# Altium PCB Mouse_Project.PcbDoc
Units mm, origin at the board's own origin, x right, y up, seen from the top; angles counter-clockwise.
Board outline 39.24 x 37.21 mm, 4 copper layers (Top Layer, Layer 1(GND), Layer 2(VCC), Bottom Layer), stack 0.603 mm thick; 26 components, 22 nets, 134 pads, 33 vias.
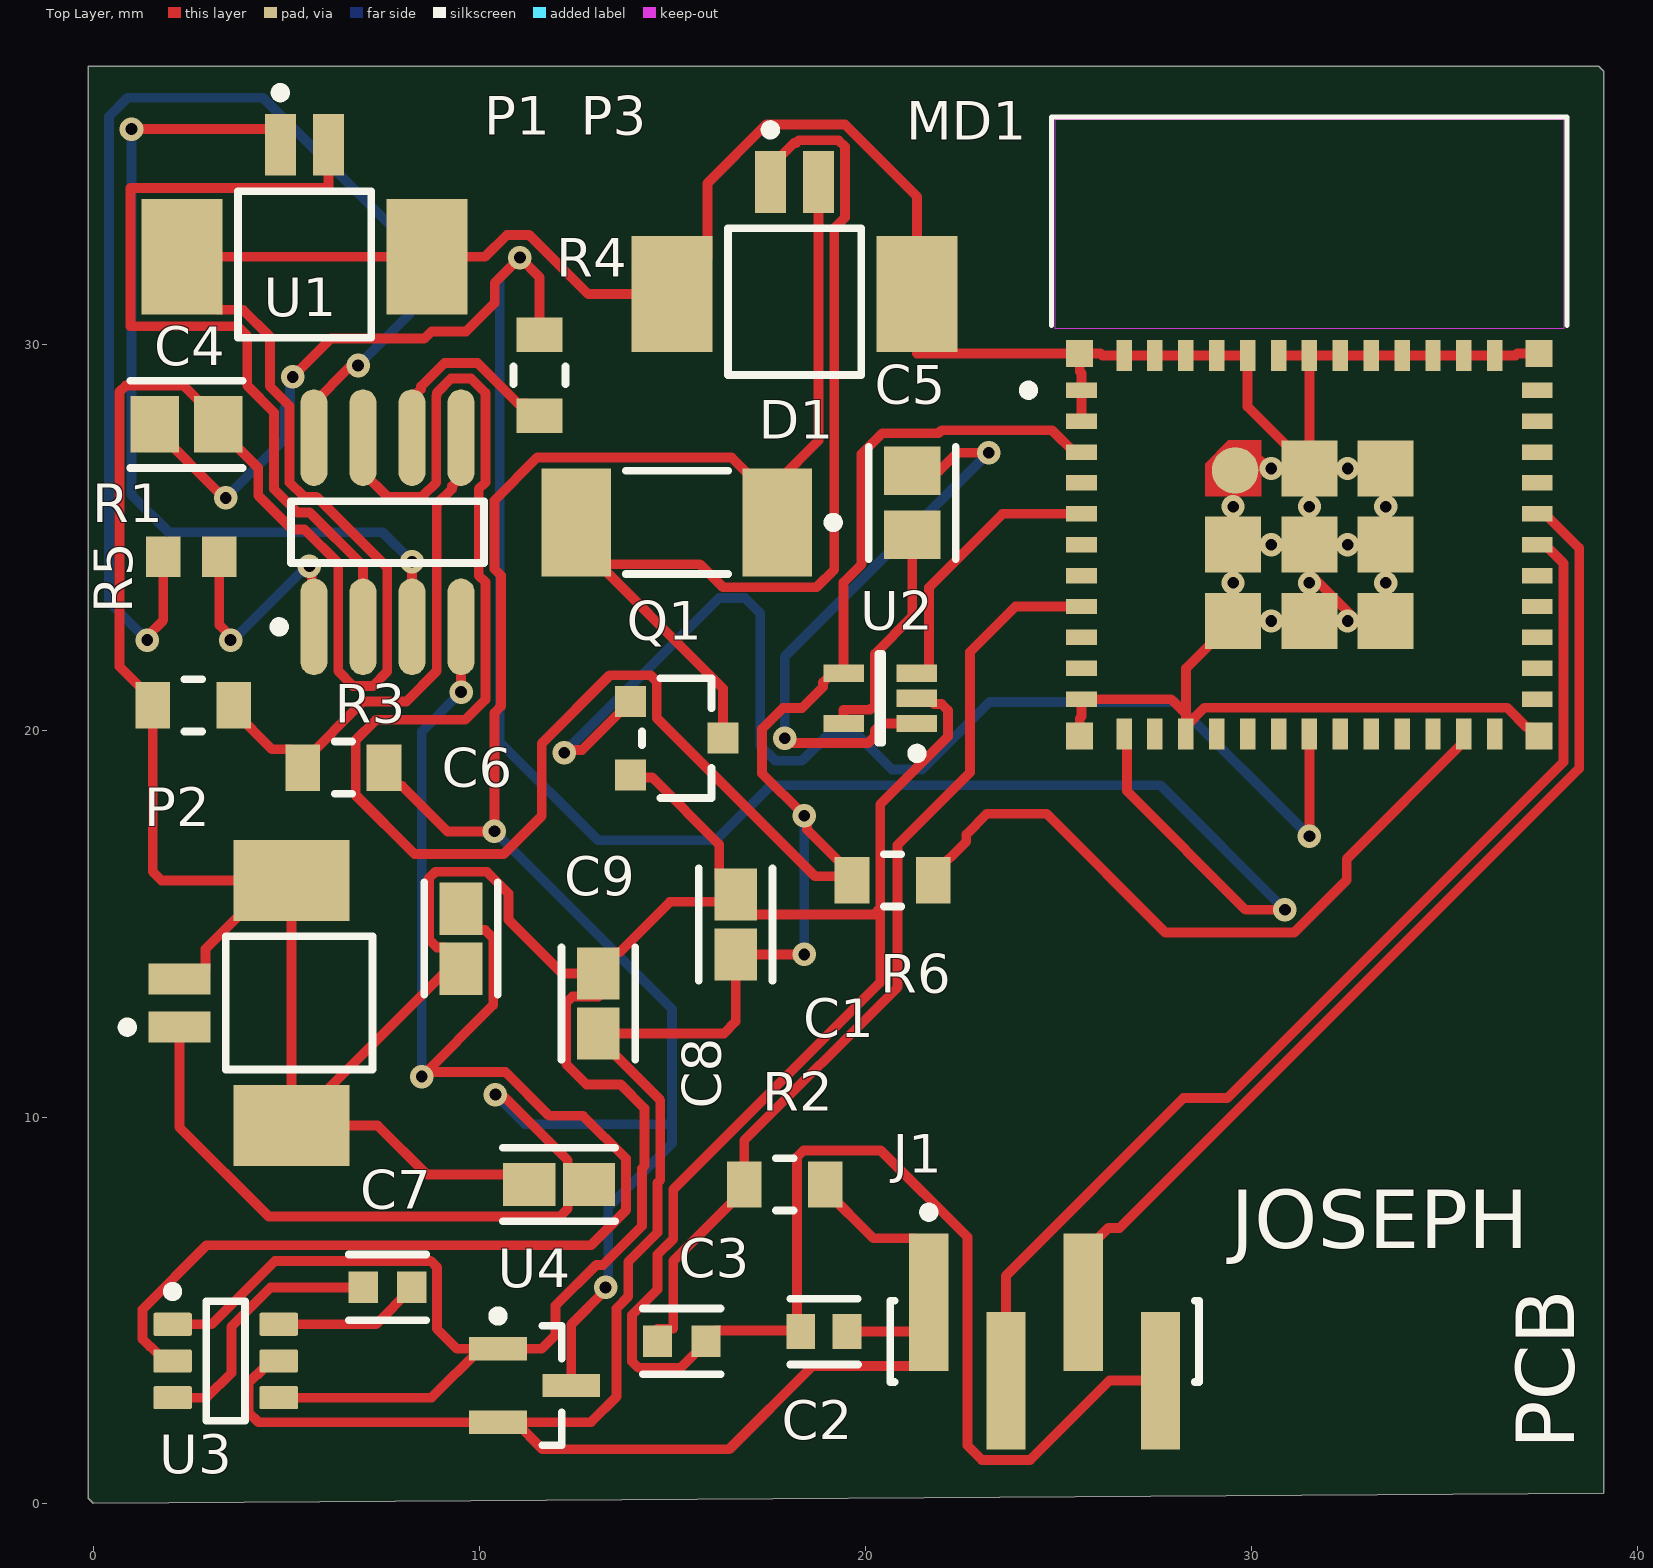
[diagram p0: Top Layer view]
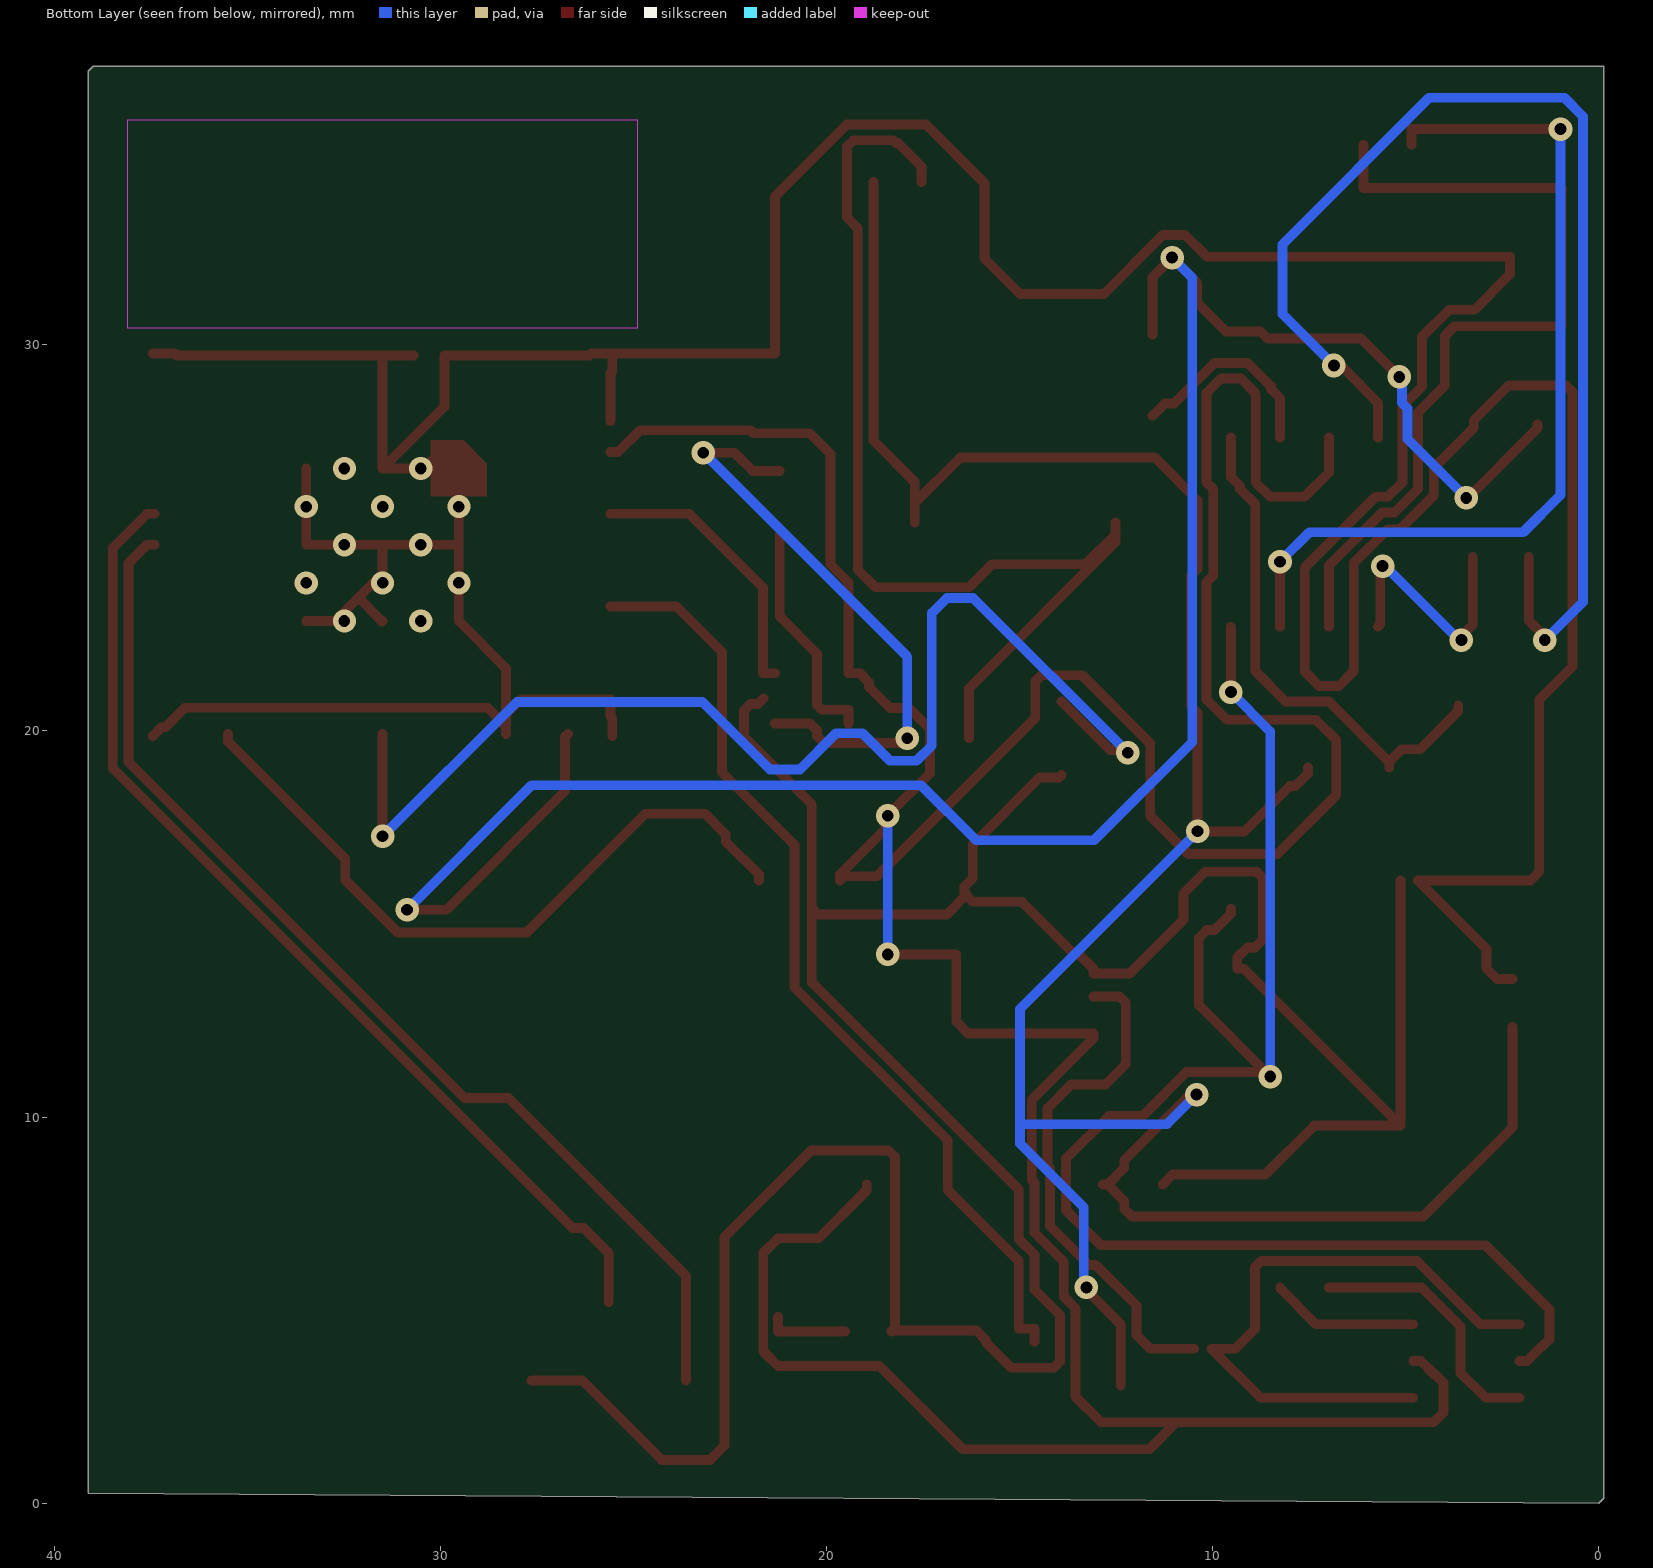
[diagram p1: Bottom Layer view, seen from below]
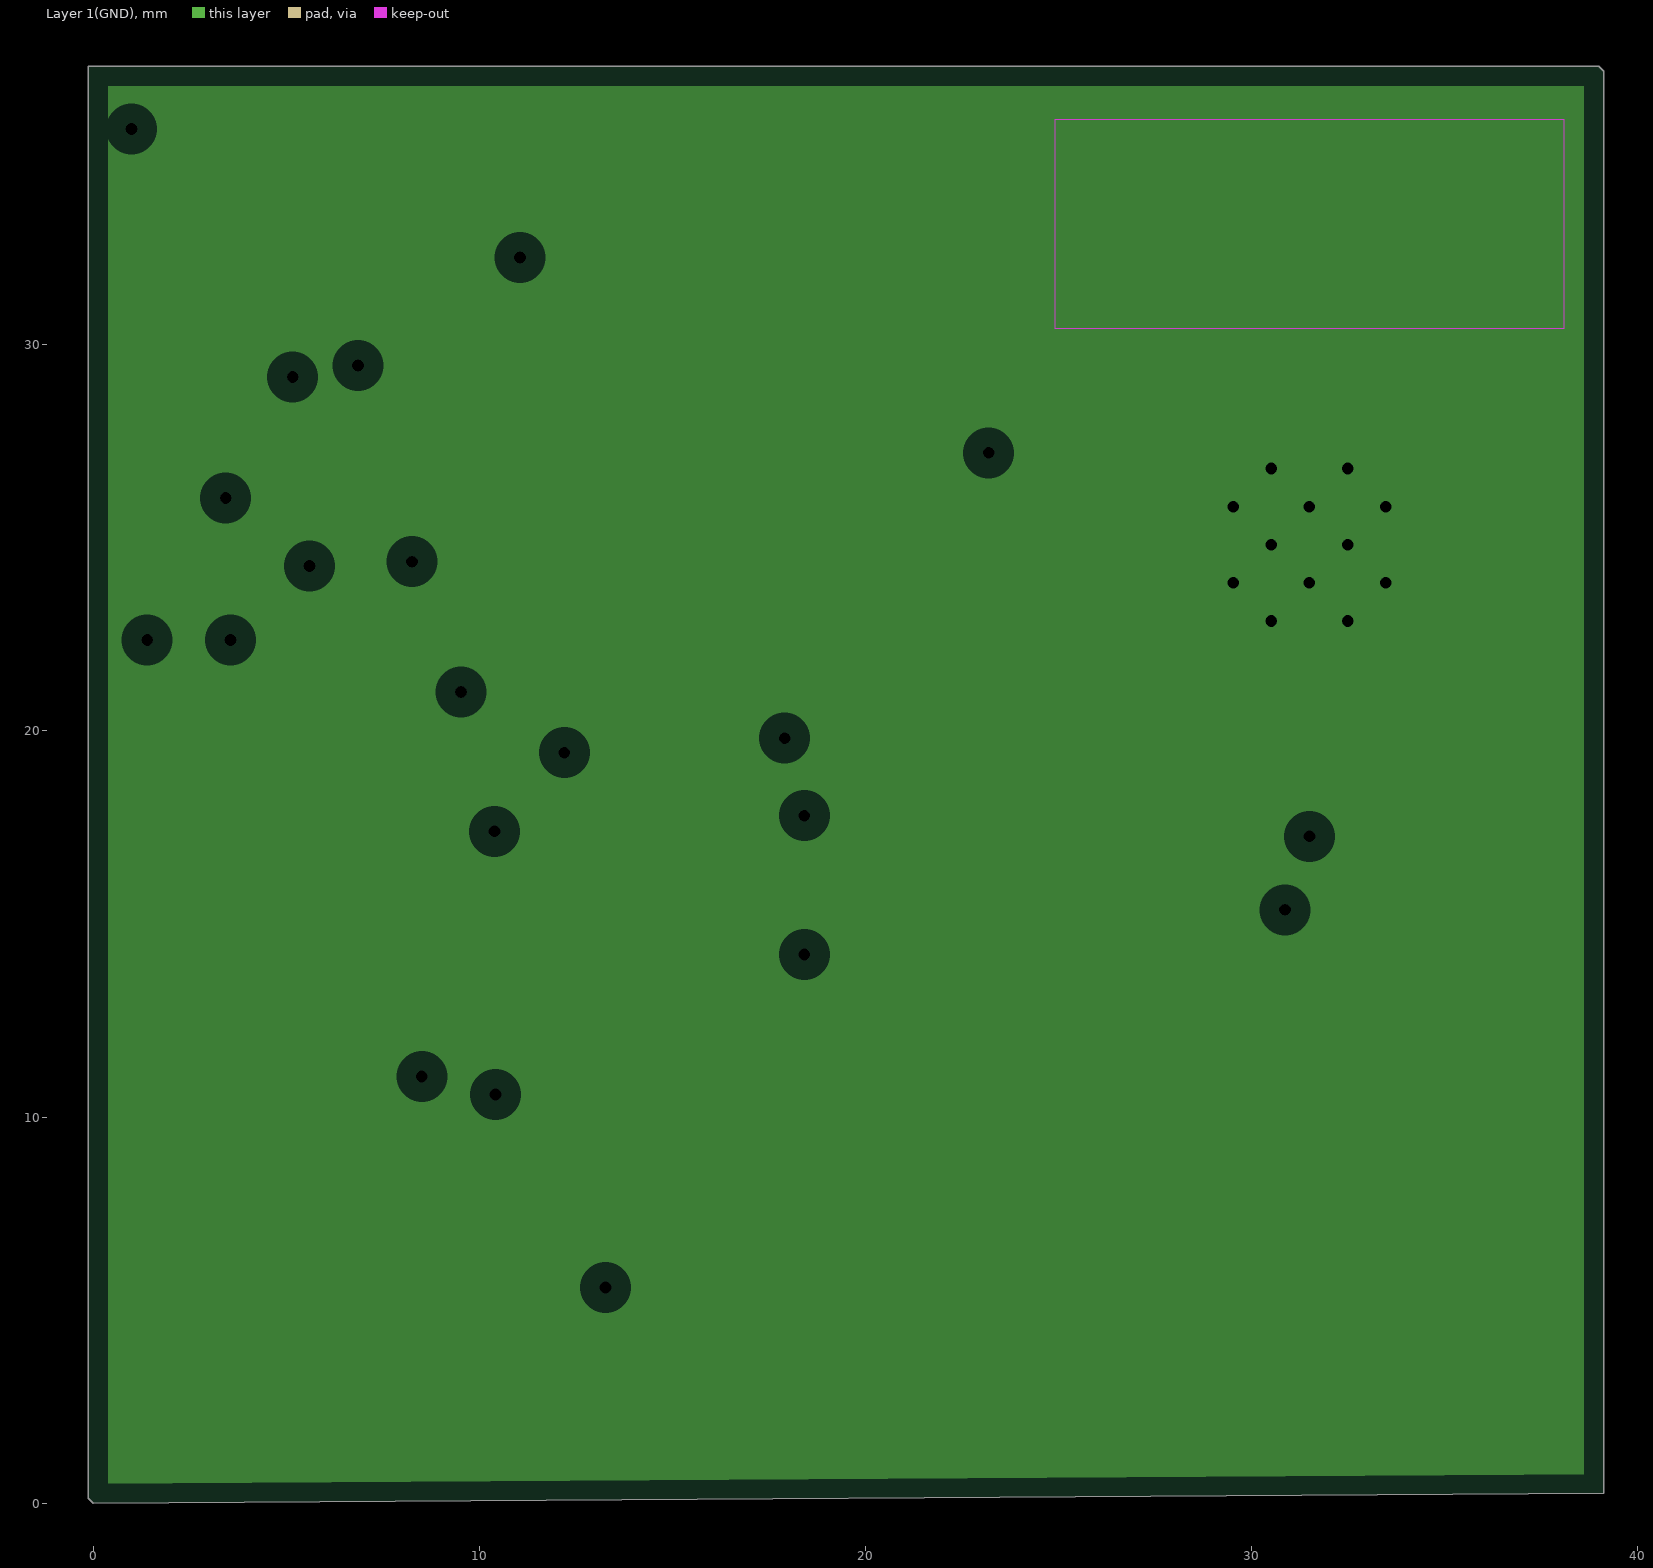
[diagram p2: Layer 1(GND), clearances drawn from the general rule]
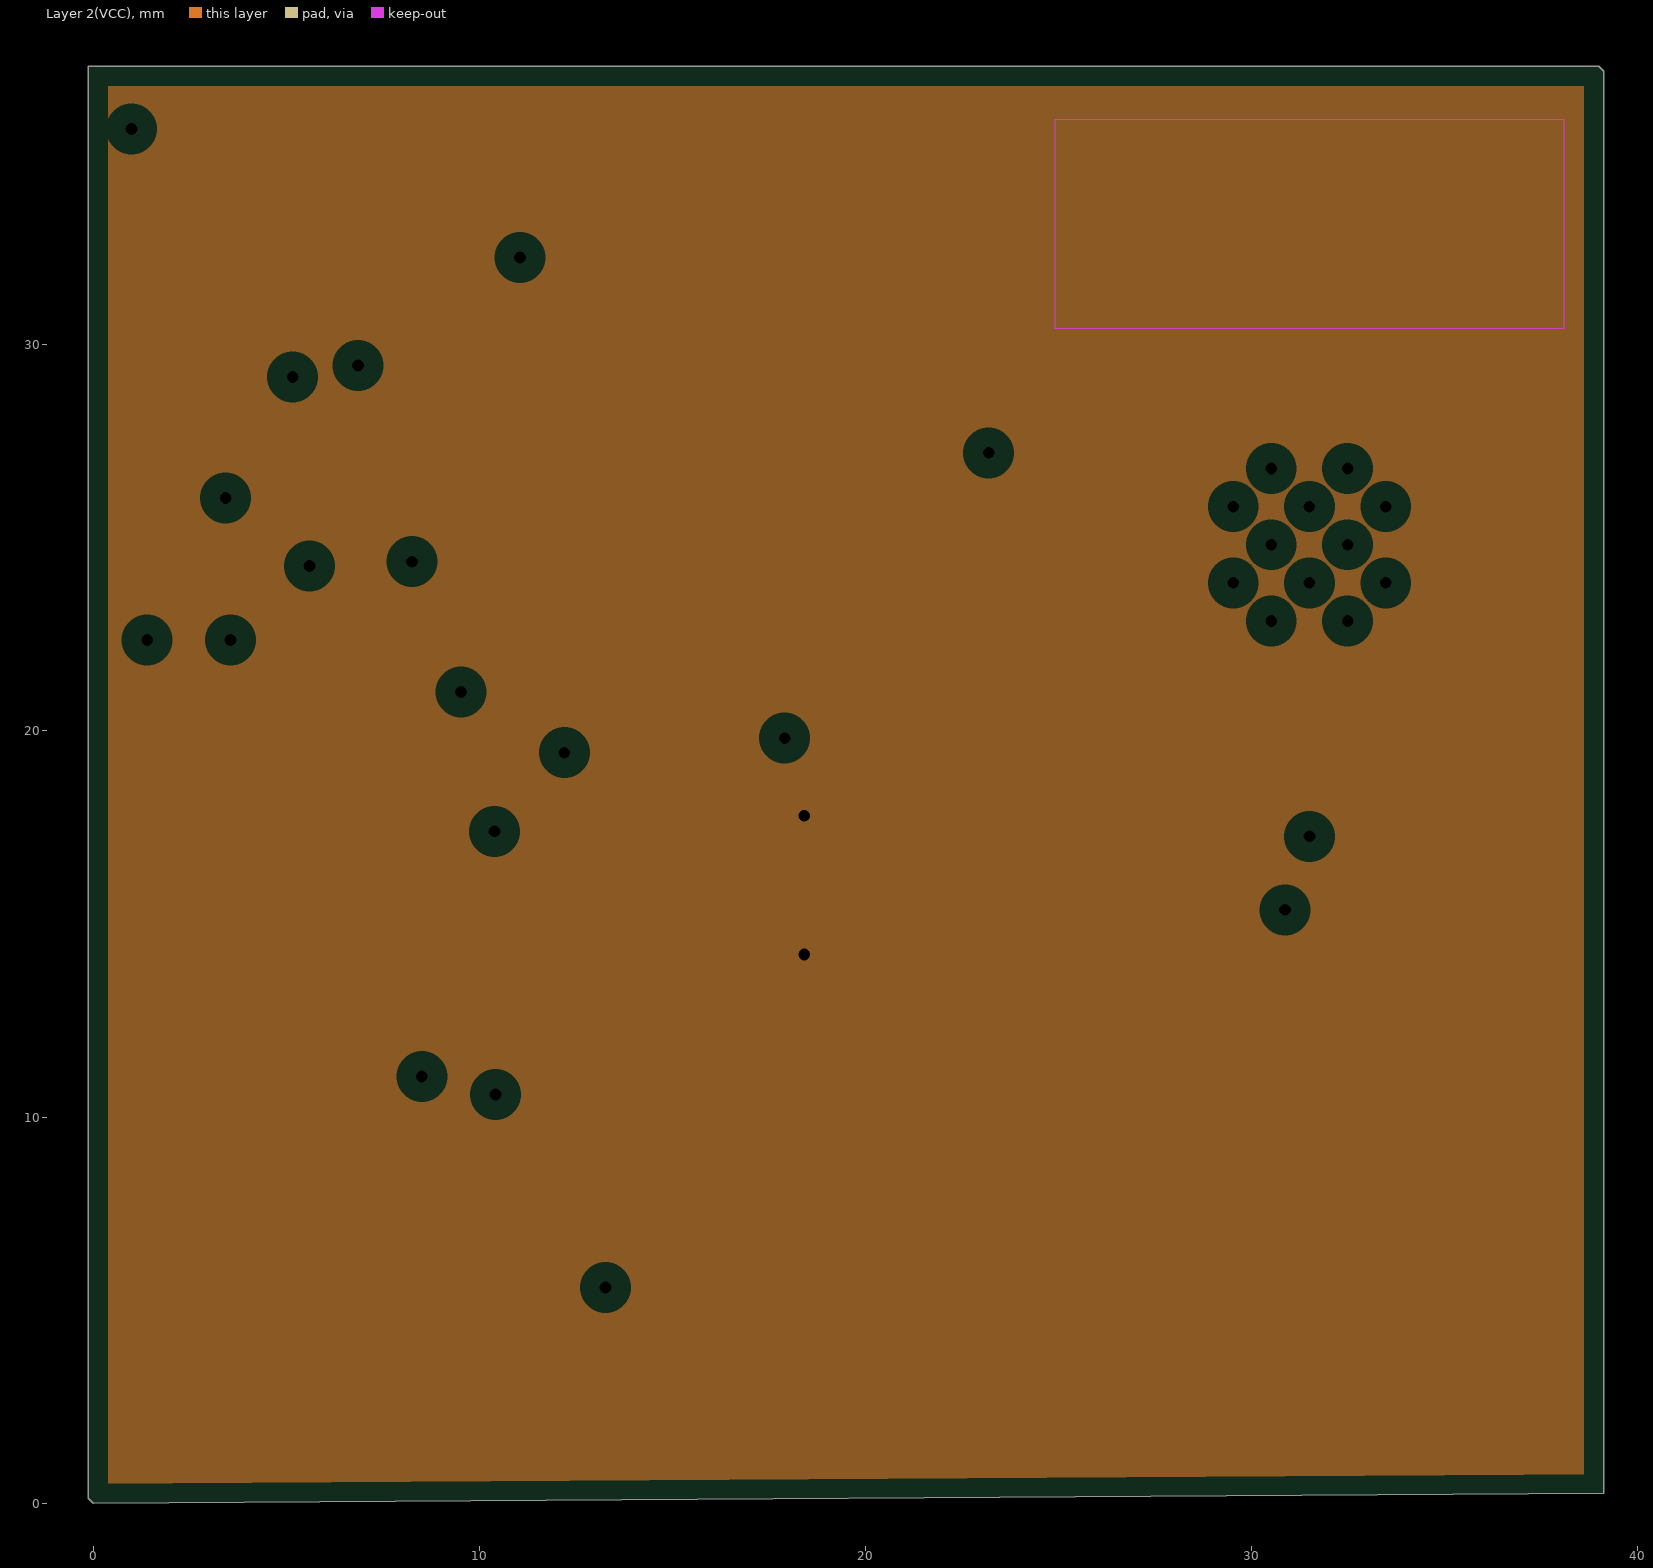
[diagram p3: Layer 2(VCC), clearances drawn from the general rule]
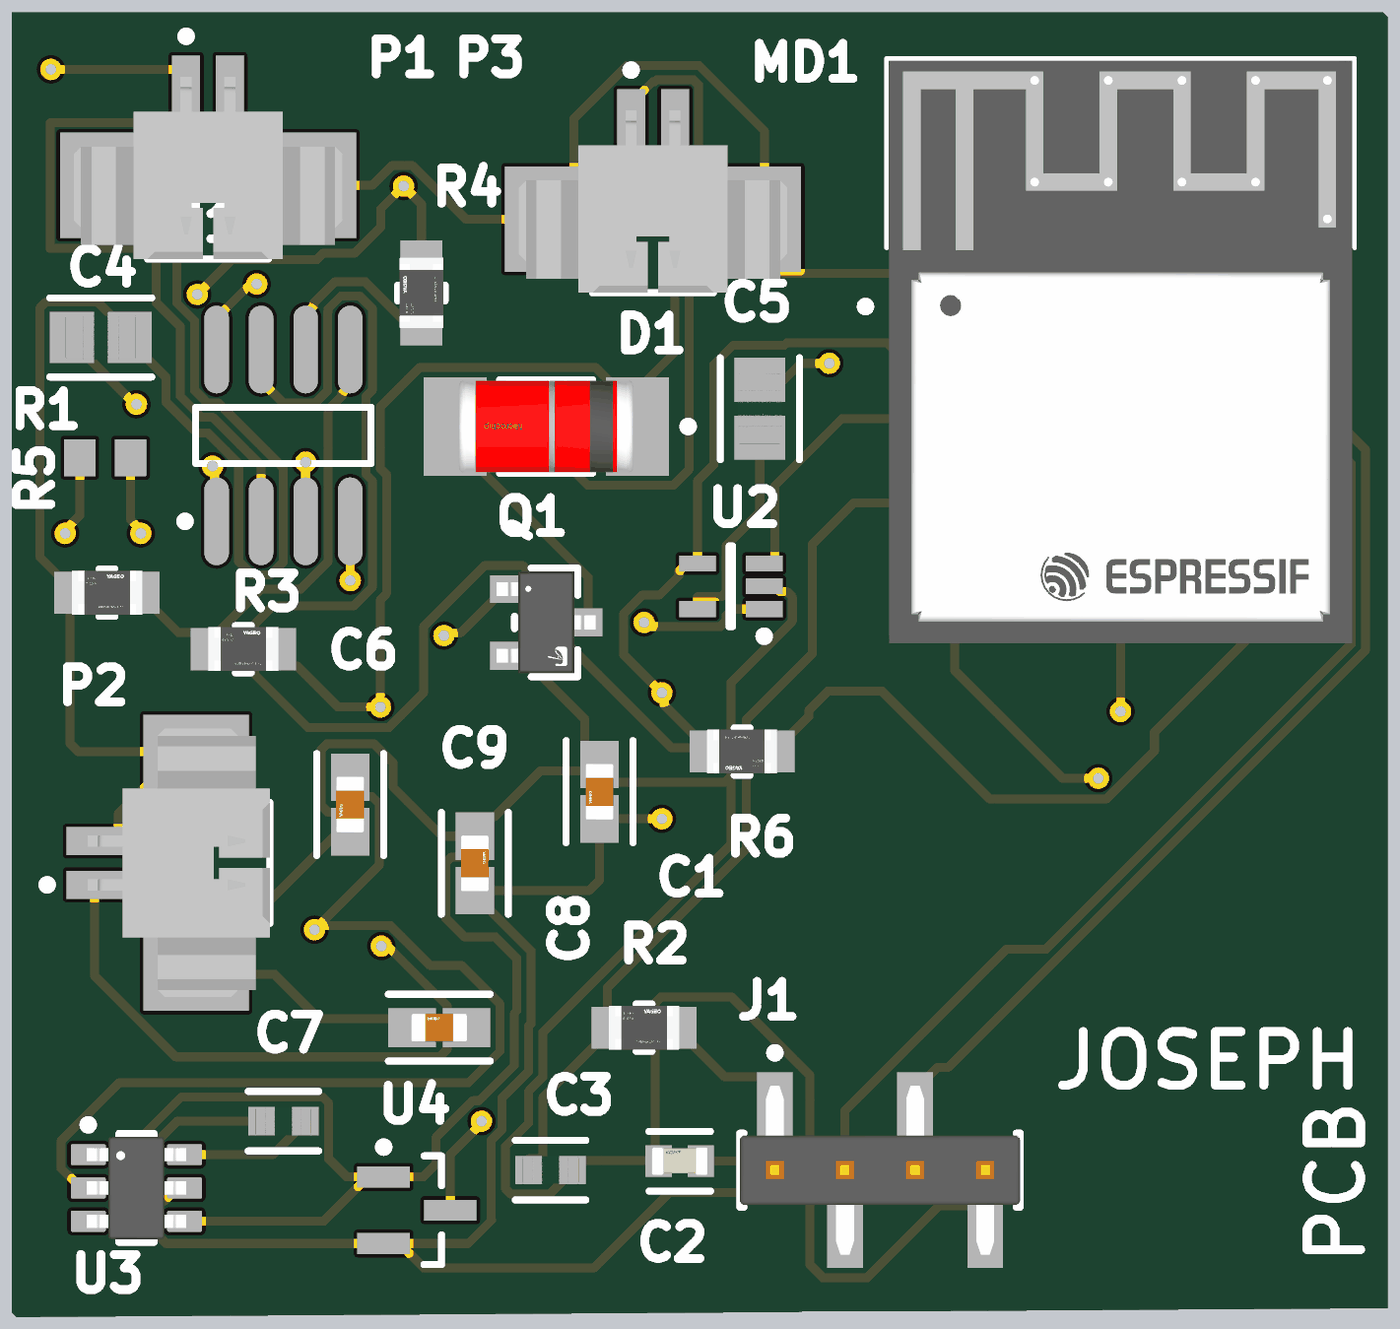
[diagram p4: 3D render of the assembled board from above, using the file's embedded part models]

## Layer stack, top to bottom
Top Solder: solder mask 0.0102, Solder Resist, Dk 3.5
Top Layer: signal copper 0.0356
Dielectric 2: prepreg 0.0711, PP-006, Dk 4.1
Layer 1(GND): plane copper 0.035, net GND
Dielectric 1: dielectric 0.32, FR-4, Dk 4.8
Layer 2(VCC): plane copper 0.035, net +3V3
Dielectric 3: prepreg 0.0711, PP-006, Dk 4.1
Bottom Layer: signal copper 0.0356
Bottom Solder: solder mask 0.0102, Solder Resist, Dk 3.5

## Board outline
0,0 -0.127,0.127 -0.127,37.211 38.989,37.211 39.116,37.084 39.116,0.254

## Design rules (kind name [scope] priority, off if disabled: settings)
Clearance [All] p1: gap=0.152 ignorepadtopadclearanceinfootprint=FALSE
MinimumSolderMaskSliver [All] p1: minsoldermaskwidth=0.01
PlaneClearance [All] p1: clearance=0.508
PlaneConnect [All] p1: planeconnectstyle=Relief reliefexpansion=0.508 reliefentries=4 reliefconductorwidth=0.254 reliefairgap=0.254
PolygonConnect [All] p1: connectstyle=Relief reliefconductorwidth=0.254 reliefentries=4 polygonreliefangle="90 Angle" airgapwidth=0.254
RoutingVias [All] p1: holewidth=0.305 width=0.61 viastyle="Through Hole" minholewidth=0.305 minwidth=0.61 maxholewidth=0.305 maxwidth=0.61
SMDNeckDown [All] p1: percent=70.000
SilkToSilkClearance [All] p1: silktosilkclearance=0.127
SilkToSolderMaskClearance [IsPad] p1: minsilkscreentomaskgap=0.025 clearancetoexposedcopper=TRUE
SolderMaskExpansion [All] p1: expansion=0.102 istentingtop=FALSE
SupplyNets "Schematic Supply Nets_2" [InNet('GND')] p1: voltage=0.000
SupplyNets "Schematic Supply Nets_1" [InNet('-3V3')] p2: voltage=0.000
SupplyNets "Schematic Supply Nets" [InNet('+3V3')] p3: voltage=0.000
Width [All] p1: maxlimit=0.254 minlimit=0.254 preferedwidth=0.254
Width EEG [InNet('EEG_SIGNAL')] p2: maxlimit=0.254 minlimit=0.152 preferedwidth=0.203 minimp=50.000000 maximp=50.000000 favimp=50.000000
Width VBAT [InNet('VBAT')] p3: maxlimit=0.889 minlimit=0.635 preferedwidth=0.635
25 further rules are at their usual default settings.

## Components (designator, comment, footprint, x,y, rotation, side; value= is the part's Value field where it differs from the comment)
C1 "10u" FP-CC0603-DC-IPC_A 16.637,14.986 r90 top
C2 "0.1uF" FP-C0603C-CF-MFG 18.923,4.445 r0 top value="0.10 μF"
C3 "1uF" FP-CL10-IPC_C 15.24,4.191 r0 top
C4 "100nF" FP-CL21-IPC_B 2.413,27.94 r0 top
C5 "100nF" FP-CL21-IPC_B 21.209,25.908 r90 top
C6 "10u" FP-CC0603-DC-IPC_A 9.525,14.619 r90 top
C7 "1uF" FP-CL10-IPC_C 7.62,5.588 r0 top
C8 "10u" FP-CC0603-DC-IPC_A 12.065,8.255 r0 top
C9 "10u" FP-CC0603-DC-IPC_A 13.081,12.94 r270 top
D1 "JANTX1N5819UR-1" FP-DO-213AB-MFG 15.113,25.4 r180 top
J1 "TMM-104-01-L-S-SM" FP-TMM-104-01-L-S-SM-MFG 24.638,4.191 r0 top
MD1 "ESP32-C3-MINI-1-N4" FP-ESP32-C3-MINI-1-N4-MFG 31.496,24.822 r0 top
P1 "Header" MOLX-53261-0271_V 5.471,33.729 r0 top
P2 "Header" MOLX-53261-0271_V 3.683,12.954 r90 top
P3 "Heater Conn" MOLX-53261-0271_V 18.161,32.766 r0 top
Q1 "AO3400A" FP-SOT23-MFG 15.113,19.812 r0 top
R1 "49.4" RESC1608X55X30ML15T15 2.54,24.511 r0 top
R2 "10k" FP-RT0805-MFG 17.907,8.255 r0 top value=10.2KΩ
R3 "10k" FP-RT0805-MFG 6.477,19.05 r0 top value=10.2KΩ
R4 "32k" FP-RT0805-MFG 11.557,29.21 r90 top value=332KΩ
R5 "10k" FP-RT0805-MFG 2.589,20.661 r0 top value=10.2KΩ
R6 "10k" FP-RT0805-MFG 20.701,16.129 r180 top value=10.2KΩ
U1 "LT1167" LT-S8-8_M 7.62,25.146 r90 top
U2 "MCP9700T-E/LT" SC70-LT5_M 20.381,20.843 r180 top
U3 "LM2664M6" DBV0006A_N 3.429,3.683 r0 top
U4 "MCP1700T-3302E/TT" SOT-23-TT3_N 11.43,3.048 r0 top

## Footprints (in the part's own frame and the unit in brackets; to place one, negate y for a bottom-side part, rotate by r counter-clockwise, add the part's x,y. Pads: shape width x height; smd on the part's side, far side on the other; paste and mask are expansions set on the pad)
DBV0006A_N [mm] "SOT23, 6-Leads, Body 3.05x1.75mm, Pitch 0.95mm, IPC Medium Density"
  rrect17% 1x0.6 smd: 1(-1.375,0.95) 2(-1.375,0) 3(-1.375,-0.95) 4(1.375,-0.95) 5(1.375,0) 6(1.375,0.95)
  silkscreen extent -1.5,-1.55 0.5,1.92, body extent -1.42,-1.46 1.42,1.46, height 1.11
FP-C0603C-CF-MFG [mm]
  rect 0.75x0.9 smd paste+0 mask+0: 1(-0.6,0) 2(0.6,0)
  silkscreen extent -0.87,-0.85 0.88,0.85, body extent -1.2,-0.6 1.2,0.6, height 0.25
FP-CC0603-DC-IPC_A [mm]
  rect 1.355x1.106 smd paste+0 mask+0: 1(-0.776,0) 2(0.776,0)
  silkscreen extent -1.45,-0.95 1.45,0.95, body extent -1.95,-1.05 1.95,1.05, height 0.25
FP-CL10-IPC_C [mm]
  rect 0.758x0.812 smd paste+0 mask+0: 1(-0.627,0) 2(0.627,0)
  silkscreen extent -1.01,-0.85 1.01,0.85, body extent -1.11,-0.55 1.11,0.55, height 0.25
FP-CL21-IPC_B [mm]
  rect 1.255x1.456 smd paste+0 mask+0: 1(-0.826,0) 2(0.826,0)
  silkscreen extent -1.45,-1.13 1.45,1.13, body extent -1.7,-0.98 1.7,0.98, height 0.25
FP-DO-213AB-MFG [mm]
  rect 1.8x2.8 smd paste+0 mask+0: 1(-2.6,0) 2(2.6,0)
  silkscreen extent -4.18,-1.34 1.33,1.34, body extent -2.5,-1.34 2.5,1.34, height 2.66
FP-ESP32-C3-MINI-1-N4-MFG [mm]
  rect 0.8x0.4 smd paste+0 mask+0: 1(-5.9,4) 2(-5.9,3.2) 3(-5.9,2.4) 4(-5.9,1.6) 5(-5.9,0.8) 6(-5.9,0) 7(-5.9,-0.8) 8(-5.9,-1.6) 9(-5.9,-2.4) 10(-5.9,-3.2) 11(-5.9,-4) 25(5.9,-4) 26(5.9,-3.2) 27(5.9,-2.4) 28(5.9,-1.6) 29(5.9,-0.8) 30(5.9,0) 31(5.9,0.8) 32(5.9,1.6) 33(5.9,2.4) 34(5.9,3.2) 35(5.9,4)
  rect 0.4x0.8 smd paste+0 mask+0: 12(-4.8,-4.9) 13(-4,-4.9) 14(-3.2,-4.9) 15(-2.4,-4.9) 16(-1.6,-4.9) 17(-0.8,-4.9) 18(0,-4.9) 19(0.8,-4.9) 20(1.6,-4.9) 21(2.4,-4.9) 22(3.2,-4.9) 23(4,-4.9) 24(4.8,-4.9) 36(4.8,4.9) 37(4,4.9) 38(3.2,4.9) 39(2.4,4.9) 40(1.6,4.9) 41(0.8,4.9) 42(0,4.9) 43(-0.8,4.9) 44(-1.6,4.9) 45(-2.4,4.9) 46(-3.2,4.9) 47(-4,4.9) 48(-4.8,4.9)
  rect 1.45x1.45 smd paste+0 mask+0: 49(-1.975,-1.975) 49(-1.975,0) 49(0,-1.975) 49(0,0) 49(0,1.975) 49(1.975,-1.975) 49(1.975,0) 49(1.975,1.975)
  round 1.207 smd paste+0 mask+0: 49(-1.926,1.926)
  rect 0.7x0.7 smd paste+0 mask+0: 50(5.95,4.95) 51(5.95,-4.95) 52(-5.95,-4.95) 53(-5.95,4.95)
  Top Layer region: -2.7,1.25 -2.7,2.1 -2.1,2.7 -1.25,2.7 -1.25,1.25
  Keep-Out Layer region: -6.6,5.6 6.6,5.6 6.6,11 -6.6,11
  silkscreen extent -7.4,3.88 6.68,11.08, body extent -6.78,-5.77 6.78,11.17, height 0.25
FP-RT0805-MFG [mm]
  rect 0.9x1.2 smd paste+0 mask+0: 1(-1.05,0) 2(1.05,0)
  silkscreen extent -0.22,-0.67 0.22,0.67, body extent -1.6,-0.77 1.6,0.77, height 0.25
FP-SOT23-MFG [mm]
  rect 0.8x0.8 smd paste+0 mask+0: 1(-1.2,0.95) 2(-1.2,-0.95) 3(1.2,0)
  silkscreen extent -0.9,-1.55 0.9,1.55, body extent -1.7,-1.78 1.7,1.78, height 0.25
FP-TMM-104-01-L-S-SM-MFG [mm]
  rect 1.02x3.56 smd paste+0 mask+0: 1(-3,1.015) 2(-1,-1.015) 3(1,1.015) 4(3,-1.015)
  silkscreen extent -4,-1.05 4,3.47, body extent -4.1,-2.9 4.1,2.89, height 0.25
LT-S8-8_M [mm] "SOIC, 8-Leads, Body 4.9x3.9mm, Pitch 1.27mm, IPC Low Density"
  oval 2.5x0.7 smd: 1(-2.45,1.905) 2(-2.45,0.635) 3(-2.45,-0.635) 4(-2.45,-1.905) 5(2.45,-1.905) 6(2.45,-0.635) 7(2.45,0.635) 8(2.45,1.905)
  silkscreen extent -2.57,-2.5 0.8,2.93, body extent -2,-2.5 2,2.5, height 1.76
MOLX-53261-0271_V [mm] "Header, 2-Leads, Pitch 1.25mm"
  rect 0.8x1.6 smd: 1(-0.625,1.45) 2(0.625,1.45)
  rect 2.1x3 smd: MP1(-3.175,-1.45) MP2(3.175,-1.45)
  silkscreen extent -1.73,-3.55 1.73,2.92, body extent -3.82,-3.55 3.83,1.65, height 3.41
RESC1608X55X30ML15T15 [mm] "Chip Resistor, 2-Leads, Body 1.60x0.80mm, IPC Low Density"
  rect 0.9x1.05 smd: 1(-0.725,0) 2(0.725,0)
  body extent -0.87,-0.48 0.87,0.48, height 0.55
SC70-LT5_M [mm] "SOT353, 5-Leads, Body 2x1.3mm, Pitch 0.65mm, Lead Span 2.1mm, IPC Low Density"
  rect 1.05x0.45 smd: 1(-0.95,0.65) 2(-0.95,0) 3(-0.95,-0.65) 4(0.95,-0.65) 5(0.95,0.65)
  silkscreen extent -1.07,-1.15 0.05,1.55, body extent -0.67,-1.12 0.68,1.13, height 1.1
SOT-23-TT3_N [mm] "SOT23, 3-Leads, Body 2.9x1.3mm, Pitch 0.95mm, Lead Span 2.4mm, IPC Medium Density"
  rect 1.5x0.6 smd: 1(-0.95,0.95) 2(-0.95,-0.95) 3(0.95,0)
  silkscreen extent -1.07,-1.55 0.7,1.92, body extent -0.7,-1.52 0.7,1.53, height 1.12

## Part data
C1 C6 C8 C9: library part CMP-03422-001507-1, "CAP CER 10UF 10V X5R 0603", Capacitance=10uF, Case Code (Imperial)=0603, Case Code (Metric)=1608, Dielectric=X5R, Max Operating Temperature=85°C, Min Operating Temperature=-55°C, Package Quantity=4000, Resistor Type=Ceramic, Tolerance=10%, Voltage Rating=10V, Case/Package=0603, Depth=0.8mm, Halogen Free="Halogen Free", Lead Free="Lead Free", Length=0.063inch, Mount="Surface Mount", Packaging="Tape and Reel", RoHS Compliant=Yes, Termination=SMD/SMT, Thickness=0.035inch, Voltage Rating (DC)=10V, Weight=7.1E-05oz, Width=0.031inch
C2: library part CMP-2006-03061-2, "CAP CER 0.1UF 50V X7R 0603", Capacitance="0.10 μF", Manufacturer=KEMET, Manufacturer Part Number=C0603C104K5RACTU, Package=C0603C-CF, Temperature="-55°C to +125°C", Temperature Characteristic=X7R, Temperature Coefficient=30ppm/°C, Temperature Range High=+125°C, Temperature Range Low=-55°C, Tolerance=0.1, Voltage Rating="50 V", Automotive=Yes, Automotive Grade="Grade 1", Category=Cap, ComponentLink2Description=Datasheet, ComponentLink2URL=https://api.kemet.com/component-edge/download/datasheet/C0603C100J5GACAUTO.pdf, Device Class L1="Passive Components", Device Class L2=Capacitors, Device Class L3="Ceramic Capacitors", Digikey Description="CAP CER 0.1UF 50V X7R 0603", Height=0.87mm, Lead Free=Yes, Material=Ceramic, Octopart=https://octopart.com/c0603c104k5ractu-kemet-139244, RoHS=TRUE
C3 C7: library part CMP-13271-004127-1, "Cap Ceramic 1uF 25V X5R ±10% Pad SMD 0603 +85°C T/R", Case Code (Imperial)=0603, Case Code (Metric)=1608, Dielectric=X5R, Max Operating Temperature=85°C, Min Operating Temperature=-55°C, Package Quantity=1, Tolerance=10%, Voltage=25V, Capacitance=1uF, Case/Package=0603, Contact Plating=Tin, Depth=0.8mm, Height=0.8mm, Lead Free="Lead Free", Length=1.6mm, Material=Ceramic, Mount="Surface Mount", Packaging="Tape and Reel", Radiation Hardening=No, Thickness=0.035inch, Voltage Rating=25V, Voltage Rating (DC)=25V, Width=0.031inch
C4 C5: library part CMP-13271-004863-1, "CL21 Series 0805 100nF 25V -20/+80% Tolerance Y5V Multilayer Ceramic Chip Capacitor"
D1: library part CMP-06358-000027-1, "DIODE SCHOTTKY 45V 1A DO213AB"
J1: library part CMP-02766-001552-1, "CONN HEADER SMD 4POS 2MM", Housing Color=Black, Max Current Rating=3.9A, Max Operating Temperature=125°C, Max Voltage Rating (AC)=500V, Min Operating Temperature=-55°C, Contact Material=Bronze, Contact Plating=Gold, Depth=1.97mm, Gender=Male, Housing Material=Polymer, Lead Free="Lead Free", Length=8mm, Number of Contacts=4, Number of Rows=1, Orientation=Straight, Packaging=Bulk, Pitch=2mm, Radiation Hardening=No, REACH SVHC="No SVHC", RoHS Compliant=Yes, Termination=Solder
MD1: library part CMP-10700-116589975-1, "Multiprotocol Modules SMD module, ESP32-C3FN4, PCB antenna, -40 C +85 C", Ambient Temperature Range High=85°C, Current - Receiving=84mA, Current - Transmitting=350mA, Max Frequency=2.484GHz, Max Supply Voltage=3.6V, Min Operating Temperature=-40°C, Min Supply Voltage=3V, Data Rate=150Mbps, Height=2.55mm, Interface=SPI, Max Operating Temperature=85°C, Number of GPIO=13
P1 P2 P3: library part CMP-2000-05633-1, "PicoBlade(TM) Header, Right Angle, -40 to 85 degC, 2-Pin SMD, RoHS, Tape and Reel", Current - Max=1A, Manufacturer=Molex, Package Description="2-Leads Header, Pitch 1.25 mm, Mated Height 3.4 mm", Package Reference=53261-0271, Package Version="Rev. H, 11/2014", Voltage - Max=125V, Brand=Molex, Contact Material=PhosphorBronze, Contact Plating=Tin, Current Rating=1A, Datasheet URL=http://www.molex.com/webdocs/datasheets/pdf/en-us/0532610271_PCB_HEADERS.pdf, Datasheet Version=03/2016, Factory Pack Quantity=1000, Housing Material=Thermoplastic, Manufacturer URL=http://www.molex.com/, Mounting Angle=Right, Mounting Style=SMD/SMT, Mounting Technology=SurfaceMount, Number of Positions=2, Number of Positions / Contacts=2, Number of Rows=1, Package URL=http://www.molex.com/pdm_docs/sd/532610271_sd.pdf, Packaging=Reel, Pitch=1.25mm, Product Category=1.25mmConnectors, Product Type=Headers, RoHS=Details, Series=53261, Termination Style=SMD, Tradename=PicoBlade, Type=Shrouded, Voltage Rating=125V
Q1: library part CMP-83955-000006-1, "MOSFET N-CH 30V 5.7A SOT23", Case/Package=SOT-23, Continuous Drain Current (ID)=5.7A, Drain to Source Voltage (Vdss)=30V, Gate to Source Voltage (Vgs)=12V, Input Capacitance=630pF, Max Operating Temperature=150°C, Max Power Dissipation=1.4W, Min Operating Temperature=-55°C, Lead Free="Lead Free", Mount="Surface Mount", Number of Elements=1, Number of Pins=3, Packaging="Tape and Reel", Power Dissipation=1.4W, Radiation Hardening=No, Rds On Max=26.5mR
R1: library part CMP-2000-00538-1, Manufacturer=Panasonic, Part Number=ERJ-3EKF49R9V
R2 R3 R5 R6: library part CMP-03412-025153-1, "RES SMD 10.2K OHM 0.5% 1/8W 0805", Manufacturer=Yageo, Manufacturer Part Number=RT0805DRD0710K2L, Package=RT0805, Power Rating=0.125W, Resistance=10.2KΩ, Temperature="-55°C to +155°C", Temperature Coefficient="25 ppm/°C", Temperature Range High=+155°C, Temperature Range Low=-55°C, Tolerance=0.01, Voltage Rating=150V, Automotive=No, Category=Res, ComponentLink2Description=Datasheet, ComponentLink2URL=http://www.yageo.com/documents/recent/PYu-RT_1-to-0.01_RoHS_L_9.pdf, Composition="Thin Film", Device Class L1="Passive Components", Device Class L2=Resistors, Device Class L3="Chip SMD Resistors", Digikey Description="RES SMD 10.2K OHM 0.5% 1/8W 0805", Footprint Url=http://www.yageo.com/exep/pages/download/literatures/PYu-R_Mount_10.pdf, Height=0.6mm, Ipc Land Pattern Name=RESC200125X50, Lead Free=Yes, Octopart=https://octopart.com/rt0805drd0710k2l-yageo-1441674, RoHS=TRUE, Series=RT
R4: library part CMP-03412-016239-1, "RES SMD 332K OHM 0.1% 1/8W 0805", Manufacturer=Yageo, Manufacturer Part Number=RT0805BRE07332KL, Package=RT0805, Power Rating=0.125W, Resistance=332KΩ, Temperature="-55°C to +155°C", Temperature Coefficient="50 ppm/°C", Temperature Range High=+155°C, Temperature Range Low=-55°C, Tolerance=0.0025, Voltage Rating=150V, Automotive=No, Category=Res, ComponentLink2Description=Datasheet, ComponentLink2URL=http://www.yageo.com/documents/recent/PYu-RT_1-to-0.01_RoHS_L_9.pdf, Composition="Thin Film", Device Class L1="Passive Components", Device Class L2=Resistors, Device Class L3="Chip SMD Resistors", Digikey Description="RES SMD 332K OHM 0.1% 1/8W 0805", Footprint Url=http://www.yageo.com/exep/pages/download/literatures/PYu-R_Mount_10.pdf, Height=0.6mm, Ipc Land Pattern Name=RESC200125X50, Lead Free=Yes, Octopart=https://octopart.com/rt0805bre07332kl-yageo-1228961, RoHS=TRUE, Series=RT
U1: library part CMP-0359-03162-2, "Single Channel, Precision Operational Amplifier, Low Bias Current IA, 1 MHz Typical GBW, 1.2 V/us Typical SR, 4.6 to 40 V, 8-Pin SOIC (S8-8), Industrial, Pb-Free", Manufacturer="Linear Technology", PartNumber=LT1167AIS8#PBF, Channels (#)=1, ComponentLink1Description="Manufacturer URL", ComponentLink1URL=http://www.linear.com/, ComponentLink2Description=Datasheet, ComponentLink2URL=http://cds.linear.com/docs/en/datasheet/1167fc.pdf, ComponentLink3Description="Package Specification", ComponentLink3URL=http://cds.linear.com/docs/en/packaging/05081610_G_SO8.pdf, DatasheetVersion="Rev. C", GBW (MHz) Typical=1, Is (mA) Typical=0.9, Linear Technology Part Number=LT1167, Mounting Technology="Surface Mount", PackageDescription="8-Pin Plastic Small Outline, Body 4.9 x 3.9 mm, Pitch 1.27 mm", PackageReference=LT-S8-8, PackageVersion="Rev G", RevisionNote="URLs updated", RoHS=Pb-Free, SR (V/us) Typical=1.2, Type=IA, Vos (mV) Typical=0.015, Vs Max (V)=40, Vs Min (V)=4.6
U2: library part CMP-0192-00174-1, "Low-Power Linear Active Thermistor IC, 5-Pin SC-70, Extended Temperature, Tape and Reel", Code_IPC=SOT353-5, DatasheetVersion="revE, Apr-2009", PackageDescription="5-Lead Plastic Small Outline Transistor (LT) [SC70]", PackageReference=SC70-LT5, PackageVersion="revBB, Aug-2009"
U3: library part CMP-0065-00095-3, "Switched Capacitor Voltage Converter, 6-pin SOT-23", Manufacturer="Texas Instruments", PackageTopMarking=S03A*XTT, PowerWise=N, Code_IPC=SOT26A-6, Code_JEDEC=MO-178-AB, ComponentLink1Description="Datasheet URL", ComponentLink1URL=http://www.ti.com/general/docs/lit/getliterature.tsp?genericPartNumber=LM2664&fileType=pdf, CompType="Switch Caps", PackageDescription="Molded SOT-23, .115 x .063 x .040in Body, 6 Lead, .0375in in Pitch", PackageReference=DBV0006A, PinCount=6, RoHS=N
U4: library part CMP-0136-00791-1, "Low Quiescent Current LDO, 3-Pin SOT-23, Extended Temperature, Tape and Reel", Code_IPC=SOT23-3, DatasheetVersion="revB, Feb-2007", PackageDescription="3-Lead Plastic Small Outline Transistor (TT) [SOT-23]", PackageReference=SOT-23-TT3, PackageVersion="revBB, Aug-2009"

## Via types
v1: diameter 0.61, hole 0.305, Top Layer to Bottom Layer, 21 vias
v2: diameter 0.6, hole 0.3, Top Layer to Bottom Layer, 12 vias

## Nets (pads, with @x,y where several pads share a name; then routed paths per layer and width w, separated by ;. In a path a pad name is that pad's centre, name@x,y a point inside that pad or via, vN(x,y) a via of type N, cw(c..) or ccw(c..) an arc to the next point about the centre after c; other vN are vias at no path point)
+3V3: C1.1 C2.2 C9.2 J1.1 MD1.3 R2.2 R6.2 U1.7 U2.4 U3.5 U4.2 | length 113.1
  Top Layer w0.254: U3.5 4.604,3.683 4.233,3.312 4.218,3.312 4.025,3.119 4.025,2.347 4.274,2.098 U4.2 ; U1.7 6.985,26.696 7.614,26.067 8.516,26.067 8.884,26.435 8.884,28.671 8.896,28.683 8.896,28.757 9.264,29.125 9.786,29.125 10.154,28.757 10.154,26.435 9.982,26.263 9.982,24.029 10.154,23.857 10.154,20.809 9.633,20.287 7.319,20.287 6.798,19.766 6.798,18.334 8.317,16.815 10.631,16.815 11.614,17.799 11.614,19.68 13.376,21.441 14.429,21.441 14.592,21.278 14.592,20.337 18.693,16.237 19.543,16.237 R6.2 19.651,16.279 18.483,17.447 18.483,17.737 v1(18.415,17.805) 17.323,18.898 17.323,20.054 17.866,20.597 18.353,20.597 18.896,21.141 18.896,21.258 19.131,21.493 U2.4 19.431,23.848 19.898,24.315 19.898,27.173 20.436,27.711 21.896,27.711 21.972,27.788 24.83,27.788 25.396,27.222 MD1.3 ; 13.548,2.771 13.548,5.04 13.854,5.346 13.854,6.251 14.615,7.012 14.615,8.297 14.686,8.368 14.686,10.435 13.081,12.04 C9.2 16.332,12.165 16.637,12.47 C1.1 v1(18.415,14.21) ; 13.557,2.762 12.893,2.098 U4.2 ; R2.2 18.957,8.105 20.203,6.859 21.255,6.859 21.638,6.476 J1.1 21.638,3.936 21.255,3.553 18.627,3.553 16.471,1.397 11.631,1.397 10.93,2.098 U4.2 ; C2.2 21.255,4.445 21.258,4.448 J1.1@21.258,4.825
  Bottom Layer w0.254: v1(18.415,14.21) v1(18.415,17.805)
-3V3: C6.2 U1.4 U3.2 | length 40.6
  Top Layer w0.254: U3.2 1.854,3.683 1.483,4.054 1.468,4.054 1.275,4.247 1.275,5.019 2.936,6.68 12.891,6.68 13.798,7.586 13.798,8.924 12.689,10.033 11.808,10.033 10.675,11.166 8.723,11.166 8.605,11.049 v1(8.509,11.049) 10.358,12.898 10.358,14.636 10.15,14.844 9.951,14.844 9.525,15.27 C6.2 ; v1(9.525,21.006) U1.4
  Bottom Layer w0.254: v1(8.509,11.049) 8.509,19.99 v1(9.525,21.006)
EEG_SIGNAL: C4.1 MD1.12 R4.2 | length 59.2
  Top Layer w0.254: C4.1 1.587,27.839 3.391,26.035 v1(3.429,26.035) ; v1(5.164,29.167) 6.156,30.159 8.574,30.159 8.759,30.345 9.657,30.345 10.396,31.084 10.396,31.605 v1(11.049,32.258) 11.557,31.75 R4.2 ; MD1.12 26.769,19.849 26.769,18.443 29.845,15.367 v1(30.861,15.367)
  Bottom Layer w0.254: v1(3.429,26.035) 4.953,27.559 4.953,28.354 5.096,28.496 5.096,29.099 v1(5.164,29.167) ; v1(11.049,32.258) 10.525,31.734 10.525,19.71 13.065,17.17 16.129,17.17 17.551,18.593 27.635,18.593 v1(30.861,15.367)
GND: C1.2 C2.1 C3.2 C4.2 C6.1 C8.1 C9.1 J1.4 MD1.1 MD1.2 MD1.11 MD1.14 MD1.36 MD1.37 MD1.38 MD1.39 MD1.40 MD1.41 MD1.42 MD1.43 MD1.44 MD1.45 MD1.46 MD1.47 MD1.48 MD1.49 MD1.50 MD1.51 MD1.52 MD1.53 P1.MP1 P1.MP2 P2.2 P2.MP1 P2.MP2 P3.MP1 P3.MP2 Q1.2 R5.1 U2.2 U3.1 U3.4 U4.1 | length 247.9
  Top Layer w0.254: U3.1 3.064,4.633 4.704,6.273 8.742,6.273 8.905,6.11 8.905,4.516 9.423,3.998 10.03,3.998 8.765,2.733 U3.4 ; P2.2 2.633,13.579 2.906,13.852 2.906,14.352 4.683,16.129 1.768,16.129 1.539,16.358 R5.1 1.539,20.811 0.68,21.669 0.68,28.784 0.844,28.948 2.332,28.948 3.239,28.041 C4.2 3.239,27.839 4.273,26.805 4.273,26.099 5.154,25.218 5.475,25.218 6.344,24.348 6.344,21.547 6.724,21.167 7.246,21.167 7.614,21.535 7.614,24.228 5.776,26.067 5.454,26.067 5.086,26.435 5.086,28.418 4.579,28.925 4.579,30.209 3.883,30.906 3.219,30.906 2.296,31.829 P1.MP1 P1.MP2 10.148,32.279 10.712,32.842 11.291,32.842 12.817,31.316 P3.MP1 15.909,32.239 15.909,34.184 17.427,35.702 19.47,35.702 21.336,33.836 P3.MP2 21.336,29.772 MD1.53 ; P2.MP2 P2.MP1 ; U4.1 11.611,3.998 11.974,4.361 11.974,5.118 13.028,6.172 13.2,6.172 14.209,7.181 14.209,8.668 14.28,8.739 14.28,10.226 13.661,10.846 12.774,10.846 12.248,11.372 12.248,12.958 12.412,13.122 C9.1@13.081,13.122 ; C8.1 11.035,8.509 8.636,8.509 7.366,9.779 P2.MP1 ; C9.1 12.147,13.716 10.753,15.11 10.753,15.792 10.194,16.351 8.856,16.351 8.692,16.187 8.692,14.601 8.9,14.393 9.099,14.393 9.361,14.131 9.361,13.843 9.197,13.843 P2.MP1 ; C9.1@13.081,13.84 13.507,14.266 13.631,14.266 14.939,15.574 16.211,15.574 16.424,15.787 16.424,15.975 16.211,16.188 16.211,17.063 14.478,18.796 13.979,18.796 Q1.2 ; C1.2@16.369,15.762 16.881,15.25 20.217,15.25 20.38,15.413 ; U2.2@21.631,20.843 21.777,20.697 21.972,20.697 22.135,20.534 22.135,19.852 20.38,18.097 20.38,15.413 ; MD1.52 25.546,20.32 25.596,20.37 MD1.11 27.915,20.822 28.296,20.441 ; MD1.2 MD1.1 25.596,29.261 25.546,29.311 MD1.53 ; J1.4 26.323,3.176 24.264,1.117 23.012,1.117 22.638,1.491 22.638,6.891 20.395,9.134 18.391,9.134 18.228,8.971 18.228,4.54 C2.1 18.298,4.47 16.119,4.47 15.867,4.218 C3.2 15.867,4.164 15.209,3.506 14.118,3.506 13.955,3.669 13.955,4.872 14.615,5.533 14.615,6.438 15.021,6.844 15.021,8.129 20.38,13.488 20.38,15.413 ; MD1.14 MD1.14@28.296,20.122 ; MD1.43 MD1.42 ; MD1.49@31.496,22.847 31.508,22.835 MD1.49@32.124,23.451 ; MD1.49@33.471,22.847 32.728,22.847 MD1.49@32.124,23.451 ; MD1.49@33.471,26.797 v2(33.471,25.809) 33.471,24.822 v2(32.484,24.822) MD1.49@31.496,24.822 ; MD1.51 37.223,20.095 37.118,20.095 36.612,20.601 28.775,20.601 MD1.14@28.296,20.122 ; MD1.50 36.88,29.772 36.83,29.722 MD1.36 MD1.37 MD1.38 MD1.39 MD1.40 MD1.41 MD1.42 ; MD1.53 26.086,29.772 26.136,29.722 MD1.48 MD1.47 MD1.46 MD1.45 MD1.44 29.896,28.397 MD1.49@31.496,26.797 ; MD1.14@28.296,20.122 28.296,20.441 ; 28.296,20.441 28.296,21.622 29.521,22.847 v2(29.521,23.834) MD1.49@29.521,24.822 ; MD1.49@29.521,24.822 v2(30.508,24.822) MD1.49@31.496,24.822 ; MD1.49@29.521,24.822 29.521,25.756 29.57,25.805 29.57,26.748 30.024,27.202 30.429,26.797 v2(30.508,26.797) MD1.49@31.496,26.797 ; MD1.49@31.496,24.822 31.496,24.079 MD1.49@32.124,23.451 ; MD1.49@31.496,26.797 MD1.42
  other v2: 30.508,22.847 32.484,22.847 31.496,23.834 33.471,23.834 29.521,25.809 31.496,25.809 32.484,26.797
MCU_RX: J1.2 MD1.30 | length 28.7
  Top Layer w0.254: J1.2 23.638,5.891 28.237,10.49 29.37,10.49 38.075,19.196 38.075,21.138 38.075,21.306 38.075,21.938 38.075,22.106 38.075,22.738 38.075,22.906 38.075,23.538 38.075,23.706 38.075,24.343 37.596,24.822 MD1.30
MCU_TX: J1.3 MD1.31 | length 26.5
  Top Layer w0.254: J1.3 25.638,6.476 26.287,7.125 26.58,7.125 38.482,19.027 38.482,24.736 37.596,25.622 MD1.31
NetC3_1: C3.1 MD1.8 R2.1 | length 24.8
  Top Layer w0.254: C3.1 14.613,4.516 15.021,4.516 15.021,6.269 16.857,8.105 R2.1 16.857,9.389 20.828,13.36 20.828,17.043 22.708,18.923 22.708,22.047 23.882,23.222 MD1.8
NetC5_1: C5.1 U2.5 | length 6
  Top Layer w0.254: U2.5 19.431,20.549 20.117,20.549 20.244,20.676 20.244,21.996 21.209,22.962 C5.1
NetC5_2: C5.2 U2.1 | length 15.5
  Top Layer w0.254: v1(17.907,19.812) 18.003,19.812 18.127,19.689 20.072,19.689 20.248,19.865 20.248,20.016 20.425,20.193 U2.1 ; C5.2 21.908,26.734 22.377,27.203 v1(23.19,27.203)
  Bottom Layer w0.254: v1(17.907,19.812) 17.907,21.92 v1(23.19,27.203)
NetC7_1: C7.1 U3.3 | length 6.8
  Top Layer w0.254: U3.3 2.935,2.733 3.577,3.375 3.577,4.571 4.594,5.588 C7.1
NetC7_2: C7.2 U3.6 | length 3.9
  Top Layer w0.254: U3.6 7.319,4.633 8.247,5.561 C7.2
NetD1_2: D1.2 P3.1 Q1.3 | length 28.3
  Top Layer w0.254: D1.2 D1.2@12.513,25.09 ; Q1.3 16.313,21.1 12.513,24.9 D1.2@12.513,25.09 ; P3.1 17.536,34.616 18.15,35.23 18.205,35.23 18.27,35.295 19.302,35.295 19.465,35.132 19.465,33.3 19.192,33.027 19.192,24.184 18.729,23.721 16.305,23.721 15.709,24.317 13.286,24.317 D1.2@12.513,25.09
NetMD1_23: MD1.23 R6.1 | length 18.5
  Top Layer w0.254: R6.1 21.751,16.279 22.61,17.138 22.61,17.32 23.146,17.856 24.689,17.856 27.762,14.783 31.103,14.783 32.462,16.142 32.462,16.688 35.496,19.722 MD1.23
NetP1_1: P1.1 U1.3 | length 23.4
  Top Layer w0.254: v1(0.991,35.585) 4.846,35.585 P1.1 ; U1.3 v1(8.255,24.384)
  Bottom Layer w0.254: v1(0.991,35.585) 0.991,26.111 1.956,25.146 7.493,25.146 v1(8.255,24.384)
NetP1_2: P1.2 U1.2 | length 21.9
  Top Layer w0.254: P1.2 6.096,34.061 0.965,34.061 0.965,30.48 3.734,30.48 3.988,30.226 3.988,28.942 4.679,28.25 4.679,26.267 5.286,25.66 5.607,25.66 6.985,24.282 U1.2
NetR1_1: R1.1 U1.8 | length 32
  Top Layer w0.254: v1(1.397,22.352) 1.397,22.448 1.815,22.866 R1.1 ; U1.8 5.715,28.496 6.615,29.396 6.79,29.396 v1(6.858,29.464)
  Bottom Layer w0.254: v1(1.397,22.352) 0.406,23.343 0.406,35.916 0.889,36.398 4.394,36.398 8.191,32.601 8.191,30.797 v1(6.858,29.464)
NetR1_2: R1.2 U1.1 | length 6.7
  Top Layer w0.254: R1.2 3.265,22.739 3.556,22.448 v1(3.556,22.352) ; v1(5.599,24.268) 5.657,24.21 5.657,22.754 U1.1
  Bottom Layer w0.254: v1(3.556,22.352) 3.619,22.352 5.535,24.268 v1(5.599,24.268)
NetR3_1: R3.1 R5.2 U1.5 | length 13.4
  Top Layer w0.254: R5.2 3.639,20.511 4.627,19.523 5.104,19.523 R3.1@5.427,19.2 ; R3.1 R3.1@5.427,19.2 ; U1.5 9.525,26.575 9.291,26.341 9.291,26.267 8.896,25.872 8.896,21.547 8.109,20.76 6.987,20.76 R3.1@5.427,19.2
NetR4_1: R4.1 U1.6 | length 5.3
  Top Layer w0.254: U1.6 8.255,28.617 8.489,28.851 8.489,28.925 9.096,29.532 9.954,29.532 11.003,28.483 11.234,28.483 R4.1
PWM_HEATER: MD1.18 Q1.1 | length 32.5
  Top Layer w0.254: v1(12.199,19.438) 12.267,19.506 12.657,19.506 Q1.1 ; v1(31.496,17.272) MD1.18
  Bottom Layer w0.254: v1(12.199,19.438) 16.205,23.444 16.879,23.444 17.272,23.051 17.272,19.621 17.665,19.228 18.352,19.228 19.063,19.939 19.75,19.939 20.69,18.999 21.463,18.999 23.216,20.752 28.016,20.752 v1(31.496,17.272)
TEMP_ADC: MD1.5 U2.3 | length 7.3
  Top Layer w0.254: U2.3 21.641,21.493 21.641,23.717 23.546,25.622 MD1.5
VBAT: C8.2 D1.1 P2.1 P3.2 R3.2 U4.3 | length 70.2
  Top Layer w0.254: P2.1 2.233,9.734 4.544,7.422 12.083,7.422 12.29,7.63 12.29,7.829 C8.2@12.716,8.255 ; R3.2 7.527,18.9 7.85,18.577 8,18.577 9.178,17.399 v1(10.389,17.399) 10.389,20.468 10.561,20.641 10.561,24.025 10.389,24.197 10.389,25.971 11.497,27.079 16.534,27.079 D1.1@17.713,25.9 ; v1(10.414,10.582) 10.482,10.514 10.656,10.514 12.29,8.88 12.29,8.681 C8.2@12.716,8.255 ; U4.3 12.38,4.633 13.27,5.523 v1(13.27,5.588) ; D1.1 D1.1@17.713,25.9 ; P3.2 18.786,27.521 17.713,26.448 D1.1@17.713,25.9 ; C8.2@12.716,8.255 C8.2 C8.2@12.716,8.255
  Bottom Layer w0.254: v1(10.389,17.399) 14.986,12.802 14.986,9.816 ; v1(10.414,10.582) 11.18,9.816 14.986,9.816 ; v1(13.27,5.588) 13.335,5.653 13.335,7.663 14.986,9.314 14.986,9.816
pads on no net: MD1.4 MD1.6 MD1.7 MD1.9 MD1.10 MD1.13 MD1.15 MD1.16 MD1.17 MD1.19 MD1.20 MD1.21 MD1.22 MD1.24 MD1.25 MD1.26 MD1.27 MD1.28 MD1.29 MD1.32 MD1.33 MD1.34 MD1.35

## Polygon pours and split planes (outlines as drawn)
GND on Layer 1(GND) (split plane): 38.606,0.761 0.383,0.513 0.383,36.701 38.606,36.701
+3V3 on Layer 2(VCC) (split plane): 38.606,0.761 0.383,0.513 0.383,36.701 38.606,36.701

## Silkscreen, mask and mechanical layers (free items; w line width, h text height)
Top Overlay:
  text "JOSEPH" at 29.464,6.604 h1.52
  text "PCB" at 38.354,1.397 h1.52 r90